# EAGLE board MegaShieldDB (EAGLE 6.4)
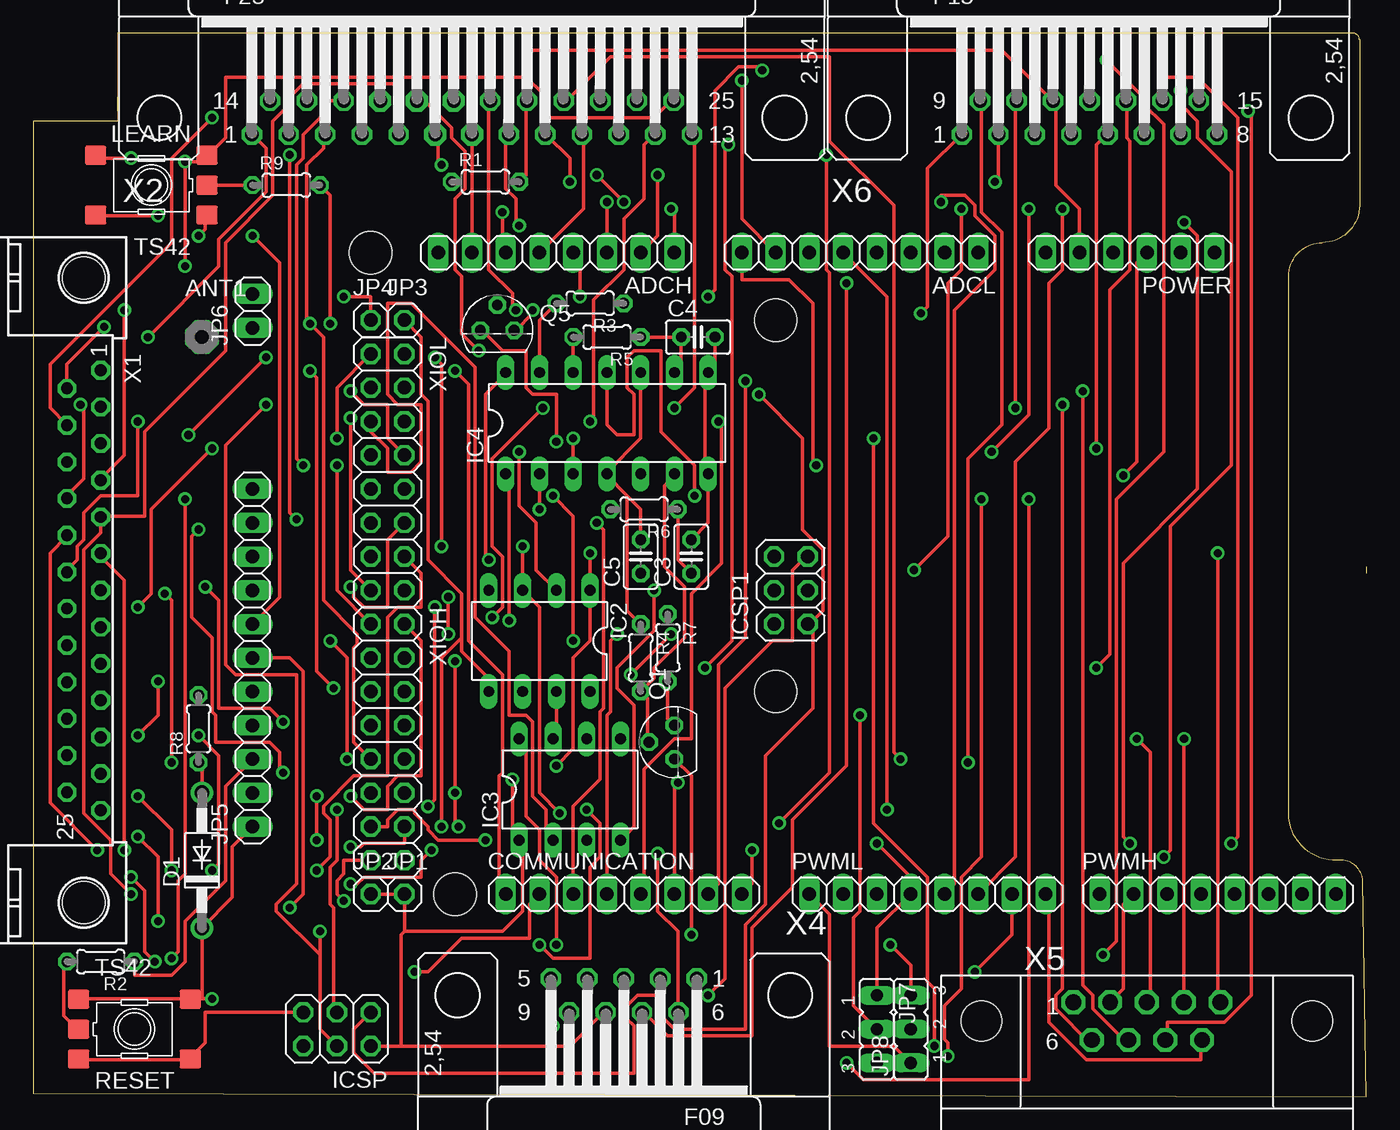
[diagram p0: board, top side]
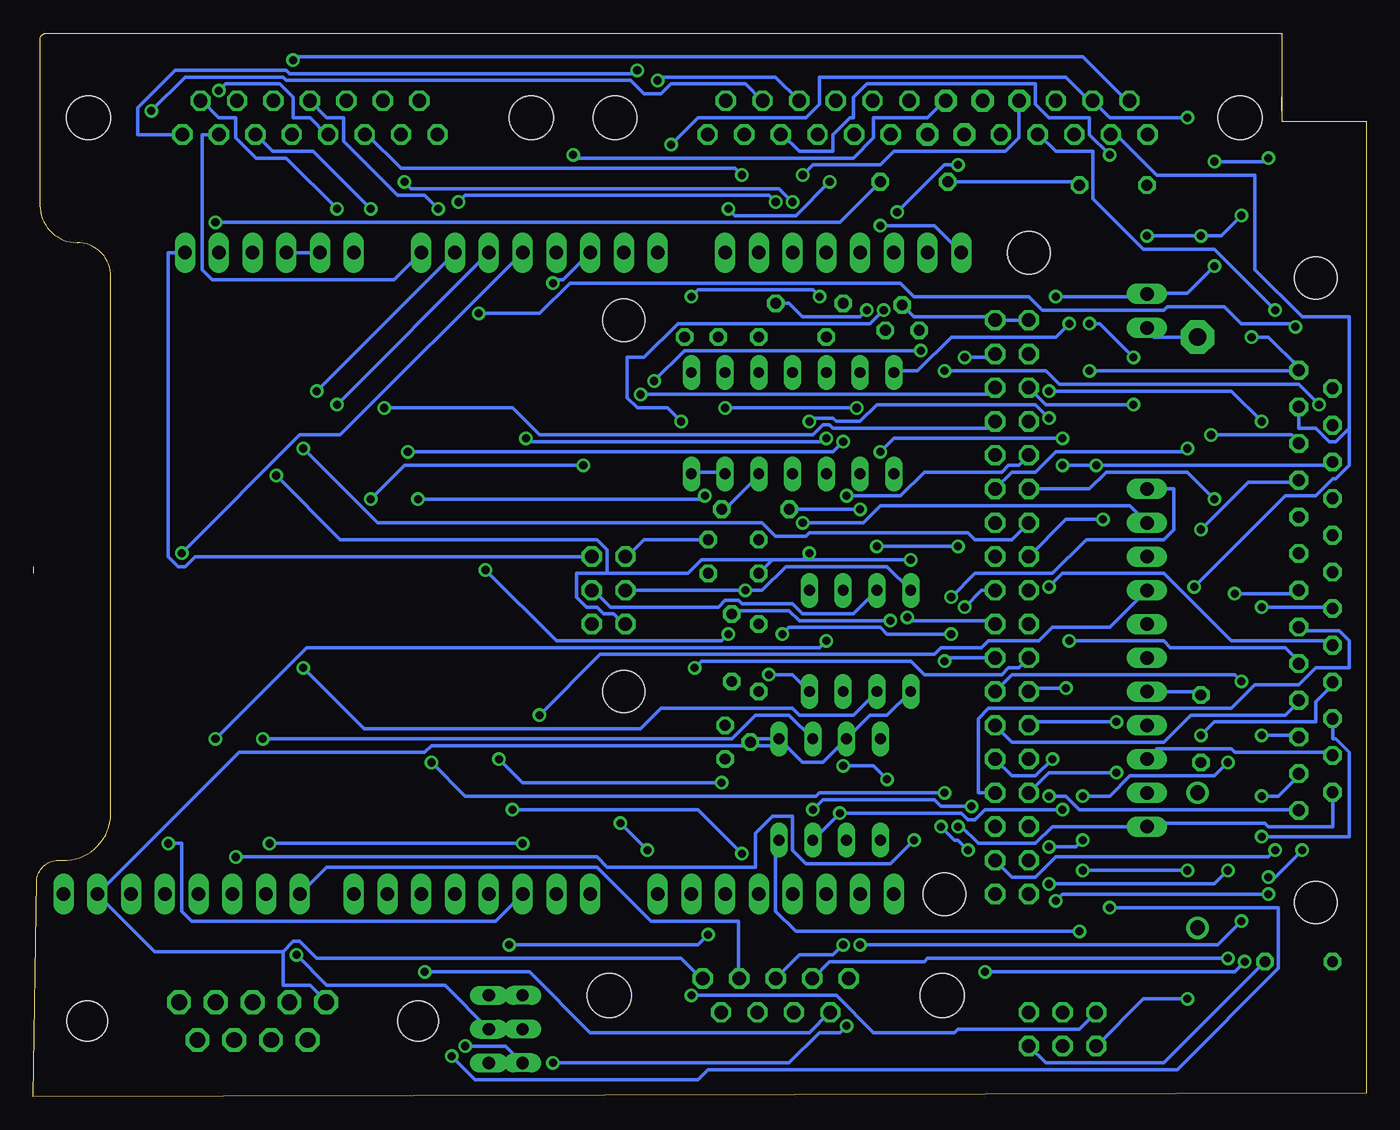
[diagram p1: board, bottom side, seen from below]

Size 100.33 x 80.01 mm. Coordinates in mm from the lower left corner, seen from the top.
Outline: 100.33,39.88 100.33,39.37
Outline: 6.35,74.17 6.35,75.18
Outline: 0,0.25 100.33,0 100.08,16.26 arc90 98.3,17.78 97.79,17.78 arc-90 94.49,21.59 94.49,61.72 arc-90 97.03,64.26 arc90 99.82,67.06 99.82,79.5 arc90 99.31,80.01 6.35,80.01 6.35,73.41 0,73.41 0,0.25
Copper layers (1*16): Top 0.035mm / dielectric 1.5mm / Bottom 0.035mm
Design rules "default": minimum track width 10mil, minimum drill 24mil, track to track 8mil, track to pad 8mil, pad to pad 8mil, via to via 8mil, smd to smd 8mil, copper to edge 40mil, drill to drill 8mil, minimum pad ring 10mil, minimum via ring 8mil, stop-mask expansion 4mil, vias tented up to drill 0mil, thermal gap 10mil
Net classes: 0 default: width 0.152 mm, drill 0.305 mm, clearance 0.152 mm
Holes 3.2 mm at 25.4,63.5 31.75,15.24 55.88,30.48 55.88,58.42 3.81,61.59 3.81,14.61

## Footprints (pad centres in the part's own frame; a part is rotated, then mirrored left to right if it is on the bottom)
1X08 = drill 1.016 long: 1 -8.89,0; 2 -6.35,0; 3 -3.81,0; 4 -1.27,0; 5 1.27,0; 6 3.81,0; 7 6.35,0; 8 8.89,0
PAD-01 = drill 1.321 pad 2.54 octagon: 1 0,0
C025-025X050 = drill 0.813 octagon: 1 -1.27,0; 2 1.27,0
DO41-10 = drill 1.118: A 5.08,0; C -5.08,0
DIL08 = drill 0.813 long: 1 -3.81,-3.81; 2 -1.27,-3.81; 3 1.27,-3.81; 4 3.81,-3.81; 5 3.81,3.81; 6 1.27,3.81; 7 -1.27,3.81; 8 -3.81,3.81
DIL14 = drill 0.813 long: 1 -7.62,-3.81; 2 -5.08,-3.81; 3 -2.54,-3.81; 4 0,-3.81; 5 2.54,-3.81; 6 5.08,-3.81; 7 7.62,-3.81; 8 7.62,3.81; 9 5.08,3.81; 10 2.54,3.81; 11 0,3.81; 12 -2.54,3.81; 13 -5.08,3.81; 14 -7.62,3.81
2X03 = drill 1.016 octagon: 1 -2.54,-1.27; 2 -2.54,1.27; 3 0,-1.27; 4 0,1.27; 5 2.54,-1.27; 6 2.54,1.27
1X01 = drill 1.016 octagon: 1 0,0
1X11 = drill 1.016 long: 1 -12.7,0; 2 -10.16,0; 3 -7.62,0; 4 -5.08,0; 5 -2.54,0; 6 0,0; 7 2.54,0; 8 5.08,0; 9 7.62,0; 10 10.16,0; 11 12.7,0
1X02 = drill 1.016 long: 1 -1.27,0; 2 1.27,0
JP2 = drill 0.914 long: 1 -2.54,0; 2 0,0; 3 2.54,0
TS42 = smd 1.6 x 1.4: 1 -4.2,2.25; 2 4.2,2.25; 3 -4.2,-2.25; 4 4.2,-2.25; 5 -4.2,0
1X06 = drill 1.016 long: 1 -6.35,0; 2 -3.81,0; 3 -1.27,0; 4 1.27,0; 5 3.81,0; 6 6.35,0
TO92 = drill 0.813 octagon: 1 1.27,0; 2 0,1.905; 3 -1.27,0
0204/5 = drill 0.813 octagon: 1 -2.54,0; 2 2.54,0
M25-HD-20 = drill 0.9 pad 1.3 octagon: 1 -16.561,1.27; 2 -13.792,1.27; 3 -11.049,1.27; 4 -8.28,1.27; 5 -5.512,1.27; 6 -2.769,1.27; 7 0,1.27; 8 2.769,1.27; 9 5.512,1.27; 10 8.28,1.27; 11 11.049,1.27; 12 13.792,1.27; 13 16.561,1.27; 14 -15.189,-1.27; 15 -12.421,-1.27; 16 -9.652,-1.27; 17 -6.909,-1.27; 18 -4.14,-1.27; 19 -1.372,-1.27; 20 1.372,-1.27; 21 4.14,-1.27; 22 6.909,-1.27; 23 9.652,-1.27; 24 12.421,-1.27; 25 15.189,-1.27
F25H = drill 1.016 octagon: 1 -16.561,-1.27; 2 -13.792,-1.27; 3 -11.049,-1.27; 4 -8.28,-1.27; 5 -5.512,-1.27; 8 2.769,-1.27; 9 5.512,-1.27; 10 8.28,-1.27; 11 11.049,-1.27; 12 13.792,-1.27; 13 16.561,-1.27; 14 -15.189,1.27; 15 -12.421,1.27; 16 -9.652,1.27; 20 1.372,1.27; 21 4.14,1.27; 22 6.909,1.27; 23 9.652,1.27; 24 12.421,1.27; 25 15.189,1.27 | drill 1.016 pad 1.67 octagon: 6 -2.769,-1.27; 7 0,-1.27; 17 -6.909,1.27; 18 -4.14,1.27; 19 -1.372,1.27 | hole 3.302: -23.52,0; 23.52,0
F09H = drill 1.016 octagon: 1 -5.486,-1.27; 2 -2.743,-1.27; 3 0,-1.27; 4 2.743,-1.27; 5 5.486,-1.27; 6 -4.115,1.27; 7 -1.372,1.27; 8 1.372,1.27; 9 4.115,1.27 | hole 3.302: -12.522,0; 12.522,0
182-009-MALE = drill 1.194 pad 1.524 octagon: 1 -5.537,10.923; 2 -2.769,10.923; 3 0,10.923; 4 2.769,10.923; 5 5.537,10.923; 6 -4.153,8.08; 7 -1.384,8.08; 8 1.384,8.08; 9 4.153,8.08 | hole 3.048: -12.446,9.501; 12.446,9.501
F15H = drill 1.016 octagon: 1 -9.601,-1.27; 2 -6.858,-1.27; 3 -4.115,-1.27; 4 -1.372,-1.27; 5 1.372,-1.27; 6 4.115,-1.27; 7 6.858,-1.27; 8 9.601,-1.27; 9 -8.23,1.27; 10 -5.486,1.27; 11 -2.743,1.27; 12 0,1.27; 13 2.743,1.27; 14 5.486,1.27; 15 8.23,1.27 | hole 3.302: -16.662,0; 16.662,0
2X08 = drill 1.016 octagon: 1 -8.89,-1.27; 2 -8.89,1.27; 3 -6.35,-1.27; 4 -6.35,1.27; 5 -3.81,-1.27; 6 -3.81,1.27; 7 -1.27,-1.27; 8 -1.27,1.27; 9 1.27,-1.27; 10 1.27,1.27; 11 3.81,-1.27; 12 3.81,1.27; 13 6.35,-1.27; 14 6.35,1.27; 15 8.89,-1.27; 16 8.89,1.27

## Placement (x,y rotation side)
ADCH  Analog In 8-15  [1X08]  39.37,63.5 180 top
ADCL  Analog In 0-7  [1X08]  62.23,63.5 180 top
ANT1  170 mm  [PAD-01]  12.7,57.15 0 top
C3  0.1uF  [C025-025X050]  49.53,40.64 90 top
C4  0.1 uF  [C025-025X050]  50.04,57.15 0 top
C5  0.1uF  [C025-025X050]  45.72,40.64 90 top
COMMUNICATION  Digital 14-21  [1X08]  44.45,15.24 0 top
D1  1N4004  [DO41-10]  12.7,17.78 90 top
IC2  MCP4802  [DIL08]  38.1,34.29 180 top
IC3  MCP4802  [DIL08]  40.39,23.11 0 top
IC4  4013N  [DIL14]  43.18,50.67 0 top
ICSP  ICSP  [2X03]  22.86,5.08 180 top
ICSP1  ICSP  [2X03]  57.02,38.1 90 top
JP1  5V  [1X01]  27.94,15.24 0 top
JP2  5V  [1X01]  25.4,15.24 0 top
JP3  GND  [1X01]  27.94,58.42 0 top
JP4  GND  [1X01]  25.4,58.42 0 top
JP5  Receiver  [1X11]  16.51,33.02 90 top
JP6  Receiver  [1X02]  16.51,59.12 90 top
JP7  [JP2]  63.5,5.08 270 top
JP8  [JP2]  66.04,5.08 90 top
LEARN  TS42  [TS42]  8.89,68.58 180 top
POWER  POWER  [1X06]  82.55,63.5 180 top
PWMH  Digital 8-13  [1X08]  89.15,15.24 0 top
PWML  Digital 0-7  [1X08]  67.31,15.24 0 top
Q1  BF199  [TO92]  48.26,26.67 90 top
Q5  BF199  [TO92]  34.92,57.66 0 top
R1  1M  [0204/5]  34.04,68.83 0 top
R2  10M  [0204/5]  5.08,10.16 180 top
R3  4.7k  [0204/5]  41.91,59.69 180 top
R4  1M  [0204/5]  45.72,33.02 270 top
R5  10M  [0204/5]  43.18,57.15 180 top
R6  10M  [0204/5]  45.97,44.2 180 top
R7  4.7k  [0204/5]  47.75,33.78 270 top
R8  10M  [0204/5]  12.45,27.69 90 top
R9  10M  [0204/5]  19.05,68.58 0 top
RESET  TS42  [TS42]  7.62,5.08 0 top
X1  M25-HD-20  [M25-HD-20]  3.81,38.1 270 top
X2  Cruise Computers  [F25H]  33.02,73.66 0 top
X4  Steer  [F09H]  44.45,7.62 180 top
X5  Brake  [182-009-MALE]  83.82,-3.81 0 top
X6  [F15H]  79.5,73.66 0 top
XIOH  Digital 22-37  [2X08]  26.67,26.67 270 top
XIOL  Digital 38-53  [2X08]  26.67,46.99 270 top

## Library data of the parts
ADCH ADCL COMMUNICATION ICSP ICSP1 JP1-JP6 POWER PWMH PWML XIOH XIOL = pinhead
ANT1 = discrete
C3-C5 R1-R9 = rcl
D1 = diode
IC2-IC4 = ic-package
JP7 JP8 = jumper
LEARN RESET = st-mod v1.4
Q1 Q5 = transistor-npn
X1 X2 X4-X6 = con-subd; OC_FARNELL: unknown; OC_NEWARK: unknown

## Nets
5VBRK: X2.24 X5.8
+5V: C5.1 IC2.1 IC3.1 IC4.14 ICSP1.2 ICSP.2 JP1.1 JP2.1 JP5.3 POWER.3 R1.1 R2.1 R9.2 X1.24 X4.8
A0: ADCL.1 X6.7
A1: ADCL.2 X5.7
A4: ADCL.5 X4.6
A5: ADCL.6 X4.7
A6: ADCL.7 X2.23
A7: ADCL.8 X4.5
A9: ADCH.2 X6.3
A10: ADCH.3 X6.2
A11: ADCH.4 X6.8
A12: ADCH.5 X2.10
A13: ADCH.6 X2.6
A14: ADCH.7 X2.7
A15: ADCH.8 X2.8
CLKA: IC4.3 JP7.3
CLKB: IC4.11 JP5.6
D0RX0: JP8.1 PWML.1
D2INT0: PWML.3 X6.14
D3INT1: JP7.1 PWML.4 R1.2 X2.21
D4: PWML.5 X2.17
D5: PWML.6 X6.15
D6: PWML.7 X4.9
D7: PWML.8 X5.9
D8: PWMH.1 X4.2
D9: PWMH.2 X5.2
D14TXD3: COMMUNICATION.8 X2.19
D15RXD3: COMMUNICATION.7 X2.18
D16TXD2: COMMUNICATION.6 X2.22
D17RXD2: COMMUNICATION.5 X2.20
D18INT2: COMMUNICATION.4 JP5.11
D19INT3: COMMUNICATION.3 JP5.10
D20INT4: COMMUNICATION.2 X1.18
D21INT5: COMMUNICATION.1 X1.17
D22: X1.6 XIOH.16
D23: X1.5 X2.5 XIOH.15
D24: X1.7 XIOH.14
D25: X6.4 XIOH.13
D26: X1.8 XIOH.12
D27: X1.4 X2.4 XIOH.11
D28: X1.9 XIOH.10
D29: X1.3 X2.3 XIOH.9
D30: X1.10 XIOH.8
D31: X1.2 X2.2 XIOH.7
D32: X1.11 XIOH.6
D33: X1.1 X2.1 XIOH.5
D34: X1.12 X6.9 XIOH.4
D35: X1.15 X2.15 XIOH.3
D36: X1.13 X2.13 XIOH.2
D37: X1.16 X2.16 XIOH.1
D38: X1.23 XIOL.16
D39: X2.12 XIOL.15
D40: X1.22 XIOL.14
D41: X2.11 XIOL.13
D42: X1.21 XIOL.12
D43: X6.5 XIOL.11
D44: X1.20 XIOL.10
D45: X4.4 XIOL.9
D46: X1.19 XIOL.8
D47: X5.4 XIOL.7
D48: X6.10 XIOL.6
D49: IC3.2 XIOL.5
D51: IC2.4 IC3.4 ICSP1.4 ICSP.4 XIOL.3
D52: IC2.3 IC3.3 ICSP1.3 ICSP.3 XIOL.2
D53: IC2.2 XIOL.1
DA: C3.1 IC4.5 R6.1
DACA: IC2.8 X6.12
DACB: IC2.6 X6.13
DACC: IC3.8 X4.3
DACD: IC3.6 X5.3
DB: C4.1 IC4.9 R5.1
FUEL: X1.14 X6.1
GND: C3.2 C4.2 D1.C IC2.5 IC2.7 IC3.5 IC3.7 IC4.6 IC4.7 IC4.8 ICSP1.6 ICSP.6 JP3.1 JP4.1 JP5.1 JP6.2 LEARN.3 LEARN.4 POWER.4 POWER.5 PWMH.7 Q1.2 Q5.2 R4.2 RESET.1 RESET.2 X1.25 X2.25 X4.1 X5.1 X6.11
N$1: ADCL.3 X5.6
N$2: IC4.1 R7.1
N$4: IC4.13 R3.2
N$5: ADCH.1 X2.9
N$6: R2.2 RESET.5
N$7: IC4.2 R6.2
N$8: ADCL.4 X5.5
N$9: ICSP1.1 ICSP.1 XIOL.4
N$10: LEARN.5 R9.1
N$12: Q1.1 R7.2
N$26: ANT1.1 JP6.1
N$28: JP5.7 LEARN.1 LEARN.2
N$33: Q5.1 R3.1
N$40: D1.A R8.1
RA: C5.2 IC4.4 IC4.10 R4.1
RCVR5: JP5.5 R8.2
RESET: ICSP1.5 ICSP.5 POWER.1 RESET.3 RESET.4
WL2: JP5.8 JP7.2
WLES: Q5.3 X6.6
WLXCOLL: JP8.3 Q1.3
X2-14: JP8.2 X2.14
~QB: IC4.12 R5.2

## Tracks (layer width: path | path; a pad name or v marks a point on that pad's centre or on a via)
5VBRK  (via drill 0.61)
  Top 0.254: v91.44,74.17 91.69,73.91 91.69,7.62 89.66,5.59 85.34,5.59 85.34,4.32 X5.8
  Bottom 0.254: v91.44,74.17 88.9,76.71 81.53,76.71 81.28,76.45 55.37,76.45 54.36,75.44 53.09,75.44 52.32,76.2 46.74,76.2 45.47,74.93 X2.24
+5V  (via drill 0.61)
  Top 0.254: 27.94,12.45 35.31,12.45 36.83,13.97 36.83,19.05 IC3.1 36.07,19.81 v36.07,23.88 | 27.94,12.45 JP1.1 JP2.1 | ICSP.2 27.69,3.81 | 27.69,3.81 40.39,3.81 42.93,6.35 X4.8 | JP5.3 14.48,23.37 14.48,16.26 11.43,13.21 11.43,10.16 10.41,9.14 7.62,9.14 R2.1 | 27.94,12.45 27.69,12.19 27.69,3.81 | v41.91,40.89 IC2.1 41.91,34.29 40.64,33.02 40.64,26.16 v39.37,24.89 | v34.29,40.39 34.04,40.64 34.04,52.83 35.56,54.36 IC4.14 | POWER.3 83.06,62.74 83.06,47.75 v82.04,46.74 | R9.2 22.35,67.82 v22.35,58.17
  Bottom 0.254: JP5.3 15.75,26.16 10.16,26.16 9.91,25.91 2.54,25.91 X1.24 | R2.1 15.24,2.54 24.13,2.54 ICSP.2 | R9.2 21.84,68.83 R1.1 | 42.42,40.39 v41.91,40.89 | 44.7,40.39 42.42,40.39 | C5.1 44.7,40.39 | 42.42,40.39 v34.29,40.39 | 57.15,39.37 51.05,39.37 50.04,40.39 44.7,40.39 | 57.15,39.37 59.44,39.37 59.44,37.59 58.67,36.83 57.91,36.83 57.4,36.32 56.64,36.32 55.88,35.56 ICSP1.2 | v82.04,46.74 77.22,41.91 57.91,41.91 57.15,41.15 57.15,39.37 | v22.35,58.17 23.37,57.15 31.24,57.15 33.78,54.61 35.56,54.61 IC4.14 | v36.07,23.88 37.08,24.89 v39.37,24.89
A0
  Bottom 0.254: ADCL.1 73.15,61.47 86.87,61.47 87.63,62.23 87.63,72.39 X6.7
A1  (via drill 0.61)
  Top 0.254: v78.99,53.09 78.99,8.38 79.76,7.62 79.76,6.6 82.3,4.06 X5.7
  Bottom 0.254: v78.99,53.09 ADCL.2
A4  (via drill 0.61)
  Top 0.254: v46.99,18.29 46.99,13.97 48.51,12.45 48.51,6.35 X4.6 | v64.26,21.59 64.26,60.2 ADCL.5
  Bottom 0.254: v46.99,18.29 50.29,21.59 v64.26,21.59
A5  (via drill 0.61)
  Top 0.254: v61.21,61.21 61.21,24.89 57.15,20.83 57.15,15.75 54.1,12.7 54.1,4.57 47.75,4.57 45.97,6.35 X4.7
  Bottom 0.254: v61.21,61.21 60.96,61.47 60.45,61.47 ADCL.6
A6  (via drill 0.61)
  Top 0.254: ADCL.7 53.34,66.04 v53.34,76.45
  Bottom 0.254: v53.34,76.45 53.09,76.71 44.45,76.71 X2.23
A7  (via drill 0.61)
  Top 0.254: v39.12,5.33 39.12,8.89 X4.5 | v61.21,2.54 62.48,1.27 74.93,1.27 v74.93,44.96 | v58.93,47.5 58.67,47.75 58.67,59.69 56.9,61.47 53.34,61.47 ADCL.8
  Bottom 0.254: v39.12,5.33 39.62,4.83 41.15,4.83 43.43,2.54 v61.21,2.54 | v74.93,44.96 72.39,47.5 v58.93,47.5
A9  (via drill 0.61)
  Top 0.254: ADCH.2 46.99,64.77 v46.99,69.34
  Bottom 0.254: v46.99,69.34 47.5,69.85 72.64,69.85 75.18,72.39 X6.3
A10  (via drill 0.61)
  Top 0.254: v43.18,67.31 ADCH.3 | v72.39,68.83 72.64,69.09 X6.2
  Bottom 0.254: v43.18,67.31 44.2,68.33 71.88,68.33 v72.39,68.83
A11  (via drill 0.61)
  Top 0.254: ADCH.4 41.15,62.99 v41.15,60.2 | v50.8,60.2 51.31,60.71 51.31,75.69 53.09,77.47 54.86,77.47 v54.86,77.22
  Bottom 0.254: v41.15,60.2 41.66,60.71 50.29,60.71 v50.8,60.2 | v54.86,77.22 55.12,76.96 81.03,76.96 81.28,77.22 89.66,77.22 92.46,74.42 92.46,72.39 X6.8
A12
  Top 0.254: ADCH.5 41.4,66.8 41.4,72.39 X2.10
A13  (via drill 0.61)
  Top 0.254: ADCH.6 35.31,63.75 v35.31,66.55 | v30.73,70.1 30.48,70.36 30.48,72.39 X2.6
  Bottom 0.254: v35.31,66.55 31.75,70.1 v30.73,70.1
A14
  Top 0.254: X2.7 ADCH.7
A15  (via drill 0.61)
  Top 0.254: v36.58,65.53 36.32,65.79 36.32,67.56 35.56,68.33 35.56,72.39 X2.8
  Bottom 0.254: ADCH.8 32.51,65.53 v36.58,65.53
CLKA  (via drill 0.61)
  Top 0.254: v40.64,49.53 IC4.3 | v63.25,49.53 63.25,20.57 67.31,16.51 67.31,8.64 67.82,8.13 v67.82,3.81
  Bottom 0.254: v40.64,49.53 40.89,49.28 62.99,49.28 v63.25,49.53 | v67.82,3.81 64.77,3.81 JP7.3
CLKB  (via drill 0.61)
  Top 0.254: IC4.11 43.18,50.55 43.94,49.78 45.21,49.78 45.21,52.83 44.7,53.34 44.7,55.63 45.21,56.13 47.24,56.13 47.24,50.04 49.78,47.5 v49.78,45.21 | v71.37,44.96 71.37,18.03 69.85,16.51 69.85,8.13 68.58,6.86 68.58,4.32 68.83,4.06 v68.83,3.05 | v19.3,14.22 20.32,15.24 20.32,32 19.3,33.02 JP5.6
  Bottom 0.254: v49.78,45.21 50.04,44.96 v71.37,44.96 | v68.83,3.05 67.06,1.27 50.29,1.27 49.53,2.03 14.22,2.03 6.6,9.65 6.6,14.22 v19.3,14.22
D0RX0
  Top 0.254: JP8.1 64.77,3.81 59.94,3.81 59.94,13.72 PWML.1
D2INT0  (via drill 0.61)
  Top 0.254: v90.17,19.05 90.68,19.56 90.68,73.66 87.63,76.71 85.09,76.71 85.09,74.93 X6.14
  Bottom 0.254: PWML.3 65.53,13.21 88.39,13.21 89.15,13.97 89.15,19.05 v90.17,19.05
D3INT1  (via drill 0.61)
  Top 0.254: R1.2 37.08,69.34 37.08,74.93 X2.21 | JP7.1 63.5,12.7 PWML.4 66.04,16.51 v63.5,19.05 | v86.61,65.79 87.63,64.77 87.63,45.72 82.04,40.13 82.04,19.56 v82.55,19.05
  Bottom 0.254: R1.2 39.62,65.79 v86.61,65.79 | v63.5,19.05 v82.55,19.05
D4  (via drill 0.61)
  Top 0.254: PWML.5 69.34,16 69.34,59.18 72.39,62.23 72.39,64.77 70.87,66.29 70.87,67.06 70.1,67.82 68.33,67.82 v68.33,67.31 | v42.42,69.34 v44.45,67.31
  Bottom 0.254: v68.33,67.31 67.82,67.82 44.96,67.82 v44.45,67.31 | v42.42,69.34 41.66,70.1 36.58,70.1 35.56,71.12 27.18,71.12 26.16,72.14 26.16,74.93 X2.17
D5  (via drill 0.61)
  Top 0.254: PWML.6 73.91,18.03 73.91,47.75 76.45,50.29 76.45,61.21 77.47,62.23 v77.47,66.8
  Bottom 0.254: v77.47,66.8 81.28,70.61 83.57,70.61 85.09,72.14 85.09,73.66 86.36,73.66 87.63,74.93 X6.15
D6  (via drill 0.61)
  Top 0.254: v70.87,9.4 73.66,12.19 PWML.7
  Bottom 0.254: v70.87,9.4 62.99,9.4 58.42,4.83 41.91,4.83 40.39,6.35 X4.9
D7
  Top 0.254: PWML.8 76.45,14.99 76.45,5.59 79.25,2.79 87.88,2.79 87.88,4.06 X5.9
D8
  Bottom 0.254: PWMH.1 78.23,17.27 57.91,17.27 53.85,13.21 47.24,13.21 47.24,8.89 X4.2
D9
  Top 0.254: PWMH.2 82.04,14.48 82.04,8.13 81.28,7.37 X5.2
D14TXD3  (via drill 0.61)
  Top 0.254: COMMUNICATION.8 54.1,16 v54.1,18.54 | v56.13,20.57 59.94,24.38 59.94,61.98 59.69,62.23 v59.69,70.87
  Bottom 0.254: v56.13,20.57 v54.1,18.54 | v59.69,70.87 59.44,70.61 38.61,70.61 37.08,72.14 37.08,73.66 33.02,73.66 31.75,74.93 X2.19
D15RXD3  (via drill 0.61)
  Top 0.254: COMMUNICATION.7 51.56,16 51.56,32.51 53.59,34.54 v53.59,53.85 | v33.53,56.13 32.26,57.4 32.26,61.72 31.75,62.23 31.75,67.56 32.51,68.33 32.51,71.12 31.5,72.14 31.5,72.9 29.46,74.93 X2.18
  Bottom 0.254: v53.59,53.85 51.31,56.13 v33.53,56.13
D16TXD2  (via drill 0.61)
  Top 0.254: v65.28,25.4 64.77,25.91 64.77,67.06 59.94,71.88 59.94,78.23 43.43,78.23 40.13,74.93 X2.22 | v48.51,23.62 48.26,23.37 COMMUNICATION.6
  Bottom 0.254: v65.28,25.4 63.5,23.62 v48.51,23.62
D17RXD2  (via drill 0.61)
  Top 0.254: COMMUNICATION.5 45.97,15.49 45.97,24.64 48.26,26.92 49.53,26.92 49.53,37.85 51.82,40.13 51.82,50.55 v51.56,50.8 | v36.32,59.18 36.07,59.44 36.07,60.45 34.29,62.23 34.29,74.93 X2.20
  Bottom 0.254: v51.56,50.8 52.58,51.82 54.86,51.82 55.63,52.58 55.63,55.63 54.36,55.63 51.82,58.17 37.34,58.17 v36.32,59.18
D18INT2  (via drill 0.61)
  Top 0.254: COMMUNICATION.4 43.18,28.7 43.43,28.96 43.43,34.29 v43.94,34.8 | v31.24,37.59 v31.24,34.8
  Bottom 0.254: v43.94,34.8 43.43,35.31 36.58,35.31 36.07,34.8 v31.24,34.8 | v31.24,37.59 29.46,39.37 23.62,39.37 21.08,41.91 15.24,41.91 14.48,42.67 14.48,45.72 JP5.11
D19INT3  (via drill 0.61)
  Top 0.254: v42.42,43.18 42.93,42.67 42.93,29.21 42.67,28.96 42.67,23.88 40.64,21.84 COMMUNICATION.3
  Bottom 0.254: JP5.10 17.78,44.45 36.58,44.45 37.85,43.18 v42.42,43.18
D20INT4  (via drill 0.61)
  Top 0.254: v4.83,18.54 1.27,22.1 1.27,40.89 2.54,42.16 X1.18 | v7.37,16.51 8.38,15.49 8.38,10.92 v9.14,10.16 | v28.7,9.4 29.72,9.4 32.26,11.94 37.34,11.94 37.34,14.48 COMMUNICATION.2
  Bottom 0.254: v4.83,18.54 6.86,16.51 v7.37,16.51 | v9.14,10.16 9.91,9.4 v28.7,9.4
D21INT5  (via drill 0.61)
  Top 0.254: v3.56,52.07 3.81,51.82 3.81,46.48 2.54,45.21 X1.17 | v31.75,54.61 32.77,53.59 32.77,34.29 35.31,31.75 35.31,24.38 35.05,24.13 35.05,15.75 COMMUNICATION.1
  Bottom 0.254: v3.56,52.07 5.08,53.59 23.11,53.59 24.13,54.61 v31.75,54.61
D22  (via drill 0.61)
  Top 0.254: v6.86,18.54 6.86,38.86 5.08,40.64 X1.6
  Bottom 0.254: v6.86,18.54 7.37,18.03 23.37,18.03 24.89,16.51 26.67,16.51 XIOH.16
D23  (via drill 0.61)
  Top 0.254: X2.5 27.43,72.39 27.43,76.2 20.32,76.2 19.3,75.18 19.3,74.68 18.03,73.41 18.03,67.82 14.48,64.26 14.48,56.13 8.38,50.04 8.38,43.69 5.08,43.69 X1.5 5.08,42.42 3.81,41.15 3.81,21.34 5.84,19.3 5.84,16.76 v7.37,15.24 | XIOH.15 23.37,17.78 23.37,16.76 22.86,16.26 22.86,15.24 v23.37,14.73
  Bottom 0.254: v23.37,14.73 22.86,15.24 v7.37,15.24
D24  (via drill 0.61)
  Top 0.254: v9.91,37.85 10.41,37.34 v10.41,25.15 | v21.34,19.3 v21.34,22.61 | v23.88,18.8 24.64,18.8 24.89,19.05 27.94,19.05 XIOH.14
  Bottom 0.254: X1.7 5.33,37.85 v9.91,37.85 | v10.41,25.15 11.43,24.13 17.78,24.13 19.3,22.61 v21.34,22.61 | v21.34,19.3 21.84,18.8 v23.88,18.8
D25  (via drill 0.61)
  Top 0.254: XIOH.13 26.67,20.32 26.67,20.83 27.43,21.59 28.7,21.59 28.7,21.34 29.72,20.32 29.72,20.07 30.48,19.3 v34.04,19.3 | v85.09,18.03 85.6,18.54 85.6,42.93 90.17,47.5 90.17,69.6 87.63,72.14 87.63,73.41 86.36,74.68 v86.36,75.69
  Bottom 0.254: v34.04,19.3 35.81,17.53 42.16,17.53 43.18,18.54 43.18,21.08 44.7,21.08 45.97,19.81 45.97,17.27 57.15,17.27 57.91,18.03 v85.09,18.03 | v86.36,75.69 85.85,76.2 81.79,76.2 80.77,75.18 80.77,73.66 79.5,73.66 78.23,72.39 X6.4
D26
  Bottom 0.254: XIOH.12 29.21,22.86 29.21,28.45 28.45,29.21 10.16,29.21 8.38,30.99 5.08,30.99 3.81,32.26 1.27,32.26 1.27,34.29 2.03,35.05 4.83,35.05 5.08,35.31 X1.8
D27  (via drill 0.61)
  Top 0.254: v6.86,59.18 6.86,48.26 5.08,46.48 X1.4 | v18.8,24.38 18.54,24.64 18.54,25.91 17.78,26.67 13.72,26.67 13.72,28.7 13.46,28.96 13.46,34.54 11.94,36.07 11.94,42.16 v12.45,42.67
  Bottom 0.254: v6.86,59.18 11.43,63.75 16.76,63.75 20.57,67.56 20.57,71.12 23.37,71.12 24.64,72.39 X2.4 | XIOH.11 23.88,24.38 v18.8,24.38 | v12.45,42.67 8.89,46.23 5.08,46.23 X1.4
D28  (via drill 0.61)
  Top 0.254: v22.35,34.29 23.62,33.02 v23.62,25.4
  Bottom 0.254: v22.35,34.29 15.24,34.29 14.73,33.78 6.1,33.78 5.08,32.77 X1.9 | v23.62,25.4 24.89,24.13 26.67,24.13 XIOH.10
D29  (via drill 0.61)
  Top 0.254: v17.53,55.63 v11.68,49.78 | X2.3 21.84,72.39 21.84,71.37 20.57,70.1 20.57,58.42 v20.83,58.17 21.84,57.15 21.84,37.34 24.38,34.8 24.38,34.04 24.13,33.78 24.13,26.67 XIOH.9
  Bottom 0.254: v11.68,49.78 5.59,49.78 5.08,49.28 X1.3 | v17.53,55.63 20.07,58.17 v20.83,58.17
D30
  Bottom 0.254: XIOH.8 26.67,26.67 15.24,26.67 13.21,28.7 6.1,28.7 5.08,29.72 X1.10
D31  (via drill 0.61)
  Top 0.254: v18.8,28.19 17.78,29.21 13.97,29.21 13.97,37.34 v12.95,38.35
  Bottom 0.254: X1.2 5.08,50.29 3.81,50.29 2.79,49.28 2.29,49.28 1.27,50.29 | 1.27,50.29 1.27,58.67 4.83,58.67 8.38,62.23 8.38,69.34 15.75,69.34 18.8,72.39 X2.2 | XIOH.7 25.15,28.19 v18.8,28.19 | v12.95,38.35 6.1,45.21 3.81,45.21 2.54,46.48 2.29,46.48 1.27,47.5 1.27,50.29
D32  (via drill 0.61)
  Top 0.254: v7.87,27.18 9.4,28.7 v9.4,31.24
  Bottom 0.254: v7.87,27.18 5.08,27.18 X1.11 | v9.4,31.24 9.91,31.75 26.67,31.75 XIOH.6
D33  (via drill 0.61)
  Top 0.254: v8.64,57.15 13.97,62.48 13.97,64.52 17.53,68.07 17.53,71.37 16.51,72.39 X2.1 | v22.61,30.73 21.34,32 21.34,54.1 v20.83,54.61
  Bottom 0.254: v8.64,57.15 7.37,57.15 5.08,54.86 X1.1 5.08,54.61 v20.83,54.61 | XIOH.5 25.15,30.73 v22.61,30.73
D34  (via drill 0.61)
  Top 0.254: v7.87,22.61 10.41,20.07 v10.41,17.02 | v23.88,16 24.38,16 24.89,16.51 29.21,16.51 29.21,17.78 v29.97,18.54 | v32,20.32 31.75,20.57 v31.75,22.86 v31.75,32.77 | v70.36,25.15 70.36,48.01 72.9,50.55 72.9,65.02 71.37,66.55 71.37,74.93 X6.9
  Bottom 0.254: v7.87,22.61 6.6,22.61 5.08,24.13 X1.12 | v10.41,17.02 11.43,16 v23.88,16 | v29.97,18.54 30.73,19.3 30.99,19.3 v32,20.32 | v31.75,32.77 31.5,33.02 XIOH.4 | v70.36,25.15 67.82,22.61 41.4,22.61 41.15,22.86 v31.75,22.86
D35  (via drill 0.61)
  Top 0.254: v13.46,73.66 10.41,70.61 10.41,64.26 1.27,55.12 1.27,51.82 2.54,50.55 X1.15 | v50.55,32.26 52.58,34.29 52.58,61.72 52.07,62.23 52.07,71.37 v52.32,71.63
  Bottom 0.254: v13.46,73.66 19.3,73.66 20.57,74.93 X2.15 20.83,74.93 22.61,76.71 41.15,76.71 41.15,74.68 42.16,73.66 50.29,73.66 v52.32,71.63 | XIOH.3 26.16,32.26 26.92,32.26 27.43,31.75 33.27,31.75 34.29,32.77 50.04,32.77 v50.55,32.26
D36  (via drill 0.61)
  Top 0.254: v23.88,22.61 24.89,21.59 26.67,21.59 26.67,23.37 27.43,24.13 29.21,24.13 29.21,34.29 XIOH.2 | v48.26,51.82 49.78,53.34 49.78,72.39 X2.13 | v38.35,51.82 34.54,48.01 34.54,41.4 35.31,40.64 35.31,36.83 v34.54,36.07
  Bottom 0.254: v23.88,22.61 22.61,22.61 21.59,21.59 5.08,21.59 X1.13 | v38.35,51.82 v48.26,51.82 | v34.54,36.07 34.29,35.81 28.19,35.81 XIOH.2
D37  (via drill 0.61)
  Top 0.254: v22.86,47.5 22.86,38.1 XIOH.1 | X2.16 21.84,74.93 21.84,73.91 20.32,72.39 20.32,70.61 19.81,70.1 19.81,48.01 v20.32,47.5
  Bottom 0.254: X1.16 2.79,47.5 v20.32,47.5 v22.86,47.5
D38  (via drill 0.61)
  Top 0.254: v7.87,19.56 9.4,18.03 v9.4,13.21 | v38.1,11.43 39.12,10.41 41.91,10.41 41.91,17.27 42.67,18.03 42.67,20.57 v41.66,21.59 | v29.72,21.84 30.23,22.35 v30.23,36.83
  Bottom 0.254: X1.23 2.54,26.92 2.29,26.92 1.27,25.91 1.27,19.56 v7.87,19.56 | v9.4,13.21 11.18,11.43 v38.1,11.43 | v41.66,21.59 40.89,22.35 32.51,22.35 32,21.84 v29.72,21.84 | v30.23,36.83 28.96,38.1 XIOL.16
D39  (via drill 0.61)
  Top 0.254: XIOL.15 23.88,39.62 v23.88,51.05 | v41.91,50.8 42.16,51.05 42.16,59.94 44.45,62.23 44.45,66.04 45.97,67.56 45.97,71.63 46.74,72.39 X2.12
  Bottom 0.254: v23.88,51.05 24.89,52.07 36.83,52.07 38.1,50.8 39.88,50.8 40.13,51.05 41.66,51.05 v41.91,50.8
D40  (via drill 0.61)
  Top 0.254: v12.45,27.18 13.97,25.65 13.97,17.53 v13.46,17.02 | v21.34,17.02 22.35,18.03 22.35,20.83 21.84,21.34 21.84,21.84 24.13,24.13 26.67,24.13 26.67,36.07 27.43,36.83 29.21,36.83 29.21,39.37 XIOL.14
  Bottom 0.254: v12.45,27.18 11.43,28.19 3.81,28.19 3.81,29.72 2.54,30.99 X1.22 | v21.34,17.02 v13.46,17.02
D41  (via drill 0.61)
  Top 0.254: v19.81,43.43 19.3,43.94 v19.3,70.87
  Bottom 0.254: XIOL.13 22.61,43.43 v19.81,43.43 | v19.3,70.87 20.83,72.39 20.83,73.66 23.88,73.66 24.89,74.68 24.89,76.2 37.59,76.2 38.61,75.18 38.61,73.66 38.86,73.66 40.13,72.39 40.13,71.12 42.67,71.12 43.94,72.39 X2.11
D42  (via drill 0.61)
  Top 0.254: v23.88,38.35 24.13,38.1 24.13,37.59 24.89,36.83 26.67,36.83 26.67,41.91 XIOL.12
  Bottom 0.254: v23.88,38.35 22.86,39.37 15.24,39.37 10.16,34.29 2.79,34.29 2.54,34.04 X1.21
D43  (via drill 0.61)
  Top 0.254: v80.01,48.77 80.01,71.63 80.77,72.39 X6.5
  Bottom 0.254: XIOL.11 26.67,41.91 29.46,41.91 29.97,42.42 41.91,42.42 42.16,42.16 44.45,42.16 45.47,43.18 74.42,43.18 v80.01,48.77
D44  (via drill 0.61)
  Top 0.254: v7.87,36.83 8.89,37.85 8.89,44.2 v13.46,48.77
  Bottom 0.254: v7.87,36.83 2.54,36.83 X1.20 | v13.46,48.77 13.72,48.51 23.37,48.51 24.89,46.99 26.67,46.99 XIOL.10
D45  (via drill 0.61)
  Top 0.254: v10.41,10.41 10.92,10.92 10.92,16.26 11.43,16.76 v11.43,44.96
  Bottom 0.254: v10.41,10.41 33.02,10.41 33.27,10.16 40.39,10.16 41.66,8.89 X4.4 | v11.43,44.96 13.46,46.99 19.56,46.99 20.83,45.72 XIOL.9
D46  (via drill 0.61)
  Top 0.254: v7.87,50.8 7.87,45.21 5.08,45.21 3.81,43.94 3.81,41.91 3.3,41.4 3.3,40.39 2.54,39.62 X1.19 | v23.88,53.09 24.89,52.07 26.67,52.07 26.67,49.53 XIOL.8
  Bottom 0.254: v7.87,50.8 10.16,53.09 v23.88,53.09
D47  (via drill 0.61)
  Top 0.254: v39.12,45.21 40.64,43.69 v40.64,34.29 | v86.61,26.92 86.61,7.37 X5.4
  Bottom 0.254: XIOL.7 26.16,47.5 26.92,47.5 27.43,46.99 33.27,46.99 35.05,45.21 v39.12,45.21 | v40.64,34.29 41.15,33.78 79.76,33.78 v86.61,26.92
D48  (via drill 0.61)
  Top 0.254: v73.91,51.82 73.91,74.93 X6.10
  Bottom 0.254: XIOL.6 28.45,50.29 40.13,50.29 40.39,50.55 40.89,50.55 41.66,49.78 62.23,49.78 64.26,51.82 v73.91,51.82
D49
  Top 0.254: IC3.2 38.61,19.81 38.61,21.59 37.59,22.61 37.59,28.19 37.08,28.7 35.81,28.7 35.81,33.53 33.27,36.07 33.27,54.86 28.45,59.69 26.67,59.69 26.67,52.83 27.43,52.07 29.21,52.07 29.21,47.75 28.45,46.99 26.67,46.99 26.67,48.77 25.4,50.04 XIOL.5
D51  (via drill 0.61)
  Top 0.254: IC3.4 45.21,20.32 45.21,29.46 43.94,30.73 43.94,32.26 46.74,35.05 v46.74,38.1 | ICSP.4 21.59,5.08 21.59,10.67 | v21.59,12.45 21.59,10.67 | v17.53,52.07 14.48,49.02 14.48,32.51 15.24,31.75 19.81,31.75 19.81,16 18.29,14.48 18.29,13.97 21.59,10.67
  Bottom 0.254: ICSP1.4 v46.74,38.1 45.47,38.1 43.69,39.88 36.07,39.88 IC2.4 | v21.59,12.45 42.93,12.45 44.45,13.97 44.45,19.3 IC3.4 | XIOL.3 24.13,52.07 v17.53,52.07
D52  (via drill 0.61)
  Top 0.254: v39.62,21.34 38.1,22.86 38.1,36.83 IC2.3 v36.83,41.4 | ICSP.3 22.61,6.6 22.61,14.22 22.35,14.48 22.35,17.27 22.86,17.78 v22.86,21.59 | v30.23,55.63 30.73,55.12 v30.73,41.4
  Bottom 0.254: IC3.3 v39.62,21.34 30.48,21.34 29.97,20.83 29.46,20.83 28.7,21.59 v22.86,21.59 | XIOL.2 28.19,55.63 v30.23,55.63 | v36.83,41.4 v30.73,41.4 | IC2.3 38.61,36.32 42.42,36.32 43.18,37.08 46.99,37.08 47.24,37.34 48.26,37.34 48.77,36.83 56.9,36.83 58.17,38.1 ICSP1.3
D53  (via drill 0.61)
  Top 0.254: IC2.2 37.85,39.62 37.85,43.18 36.58,44.45 v36.58,48.51 | v22.86,49.53 22.86,53.34 XIOL.1
  Bottom 0.254: v36.58,48.51 35.56,49.53 v22.86,49.53
DA
  Top 0.254: C3.1 48.51,40.39 R6.1
  Bottom 0.254: R6.1 48.26,44.2 45.72,46.74 IC4.5
DACA  (via drill 0.61)
  Top 0.254: v48.01,34.8 v44.96,31.75 | v66.29,39.62 68.83,42.16 68.83,61.21 69.85,62.23 v69.85,66.8
  Bottom 0.254: IC2.8 43.18,31.75 v44.96,31.75 | v48.01,34.8 48.51,34.29 60.96,34.29 v66.29,39.62 | v69.85,66.8 70.87,67.82 72.9,67.82 76.96,71.88 76.96,73.66 78.23,73.66 X6.12
DACB  (via drill 0.61)
  Top 0.254: v80.01,32.26 81.03,33.27 81.03,60.71 82.55,62.23 82.55,71.88 82.3,72.14 82.3,74.93 X6.13
  Bottom 0.254: IC2.6 38.61,28.7 42.67,28.7 43.18,29.21 53.09,29.21 54.61,27.69 75.44,27.69 v80.01,32.26
DACC  (via drill 0.61)
  Top 0.254: IC3.8 37.08,26.42 37.08,21.08 38.1,20.07 38.1,17.78 39.37,16.51 v39.37,11.43
  Bottom 0.254: v39.37,11.43 40.13,10.67 42.67,10.67 X4.3
DACD  (via drill 0.61)
  Top 0.254: v83.06,26.92 84.07,25.91 84.07,7.62 83.82,7.37 X5.3
  Bottom 0.254: IC3.6 43.43,28.7 45.97,28.7 47.75,26.92 v83.06,26.92
DB
  Top 0.254: IC4.9 48.26,54.61 48.77,55.12 C4.1 R5.1
FUEL  (via drill 0.61)
  Top 0.254: X1.14 2.54,55.12 v5.33,57.91 | v66.8,58.93 67.31,59.44 67.31,69.85 69.85,72.39 X6.1
  Bottom 0.254: v5.33,57.91 5.59,58.17 9.4,58.17 10.67,59.44 14.99,59.44 15.24,59.18 24.38,59.18 25.4,60.2 34.04,60.2 35.05,61.21 59.94,61.21 62.23,58.93 v66.8,58.93
GND  (via drill 0.61)
  Top 0.254: POWER.5 78.74,66.8 76.96,68.58 76.96,74.93 X6.11 76.71,74.93 72.9,78.74 37.08,78.74 37.08,76.71 | v7.37,70.61 4.83,70.61 LEARN.4 | 37.08,76.71 38.35,75.44 38.35,73.66 46.74,73.66 48.01,74.93 X2.25 | 37.08,76.71 14.48,76.71 14.48,72.14 13.21,70.87 LEARN.3 12.95,70.61 12.95,70.36 v11.43,70.36 v11.43,62.48 | RESET.1 3.56,7.37 11.68,7.37 RESET.2 11.94,7.37 12.7,7.37 | 12.7,7.37 v13.46,7.37 | 12.7,7.37 D1.C 14.99,14.99 14.99,18.8 JP5.1 | v23.37,60.2 25.4,60.2 JP4.1 | Q1.2 46.23,26.67 46.23,29.97 R4.2 46.74,31.5 46.74,32.26 49.02,34.54 49.02,38.35 47.5,39.88 47.5,45.97 48.26,46.74 IC4.6 | IC3.7 39.37,27.18 IC2.7 | C4.2 51.31,55.12 50.8,54.61 IC4.8 50.8,54.36 50.55,54.1 50.55,47.24 50.8,46.99 IC4.7 50.8,43.18 C3.2 | JP3.1 29.21,57.15 29.21,52.83 29.72,52.32 29.72,40.39 32.26,37.85 32.26,34.54 | 32.26,34.54 32.26,33.53 34.29,31.5 IC2.5 | v30.73,20.32 30.73,33.02 32.26,34.54
  Bottom 0.254: POWER.4 POWER.5 | v7.37,70.61 7.62,70.36 v11.43,70.36 | 81.53,10.92 80.77,11.68 80.26,11.68 78.99,10.41 51.56,10.41 50.04,8.89 X4.1 | 81.53,10.92 81.53,8.38 79.5,8.38 78.49,7.37 X5.1 | 81.53,10.92 91.19,10.92 PWMH.7 84.84,25.91 70.87,25.91 70.36,26.42 43.69,26.42 | X1.25 2.54,20.32 7.37,20.32 7.62,20.57 16.26,20.57 JP5.1 23.62,20.32 24.89,19.05 29.21,19.05 30.48,20.32 v30.73,20.32 | ICSP.6 16.76,7.37 v13.46,7.37 | Q5.2 34.04,58.67 28.19,58.67 JP3.1 JP4.1 | v23.37,60.2 16.51,60.2 JP6.2 16.51,60.45 13.46,60.45 v11.43,62.48 | Q1.2 46.23,26.67 45.97,26.92 IC3.5 43.69,26.42 | IC2.5 36.07,28.7 37.34,28.7 IC3.7 40.89,25.15 42.42,25.15 43.69,26.42 | IC4.6 48.26,46.99 50.8,46.99 IC4.7 | C3.2 54.36,41.91 55.63,40.64 ICSP1.6
N$1  (via drill 0.61)
  Top 0.254: v77.47,52.07 77.47,8.13 76.96,7.62 76.96,6.6 79.5,4.06 X5.6
  Bottom 0.254: v77.47,52.07 ADCL.3
N$2  (via drill 0.61)
  Top 0.254: v35.81,35.81 35.81,46.48 35.56,46.74 IC4.1
  Bottom 0.254: R7.1 47.5,36.58 43.43,36.58 42.67,35.81 v35.81,35.81
N$4
  Top 0.254: IC4.13 38.1,58.42 R3.2
N$5  (via drill 0.61)
  Top 0.254: v40.39,68.83 40.39,70.61 38.61,72.39 X2.9 | v48.01,66.8 48.26,66.55 ADCH.1
  Bottom 0.254: v40.39,68.83 42.93,66.29 47.5,66.29 v48.01,66.8
N$6
  Top 0.254: R2.2 2.29,9.91 2.29,6.1 3.3,5.08 RESET.5
N$7  (via drill 0.61)
  Top 0.254: v38.1,44.2 IC4.2
  Bottom 0.254: R6.2 v38.1,44.2
N$8  (via drill 0.61)
  Top 0.254: v89.15,40.89 89.15,7.37 X5.5
  Bottom 0.254: ADCL.4 77.22,49.78 80.26,49.78 v89.15,40.89
N$9  (via drill 0.61)
  Top 0.254: ICSP.1 24.13,5.08 24.13,3.3 25.65,1.78 45.21,1.78 45.21,5.33 44.7,5.84 44.7,6.86 45.47,7.62 47.24,7.62 47.24,6.1 48.26,5.08 53.59,5.08 53.59,12.95 55.12,14.48 55.12,25.65 58.67,29.21 58.67,35.31 58.42,35.56 | v54.61,52.83 57.91,49.53 57.91,42.67 59.44,41.15 59.44,36.58 58.42,35.56 | 58.42,35.56 ICSP1.1
  Bottom 0.254: XIOL.4 28.45,52.83 v54.61,52.83
N$10
  Top 0.254: R9.1 LEARN.5
N$12
  Top 0.254: Q1.1 47.75,28.45 R7.2
N$26
  Bottom 0.254: ANT1.1 16,57.15 16.51,57.66 JP6.1
N$28  (via drill 0.61)
  Top 0.254: v9.4,66.29 4.83,66.29 LEARN.2 | v12.45,64.77 12.95,65.28 12.95,66.29 LEARN.1 | JP5.7 18.54,37.59 18.54,62.74 v16.51,64.77
  Bottom 0.254: v9.4,66.29 10.92,64.77 v12.45,64.77 v16.51,64.77
N$33  (via drill 0.61)
  Top 0.254: v37.59,59.18 37.59,58.93 36.32,57.66 Q5.1
  Bottom 0.254: v37.59,59.18 38.1,58.67 42.42,58.67 43.43,59.69 R3.1
N$40
  Top 0.254: R8.1 12.7,24.89 D1.A
RA
  Top 0.254: 44.7,45.21 45.72,44.2 C5.2 | 44.7,45.21 43.18,46.74 IC4.4 43.18,46.99 45.72,49.53 IC4.10 | R4.1 44.7,36.58 44.7,45.21
RCVR5
  Bottom 0.254: R8.2 12.7,30.48 JP5.5
RESET  (via drill 0.61)
  Top 0.254: RESET.3 3.56,2.79 11.68,2.79 RESET.4 11.94,3.05 12.95,4.06 12.95,6.35 ICSP.5 | v50.8,7.62 52.07,8.89 52.07,30.73 55.63,34.29 57.15,34.29 57.15,39.62 58.17,40.64 ICSP1.5
  Bottom 0.254: ICSP1.5 88.14,40.64 88.9,39.88 89.41,39.88 90.17,40.64 90.17,63.5 POWER.1 | ICSP.5 21.59,5.08 30.73,5.08 30.99,4.83 37.08,4.83 39.88,7.62 v50.8,7.62
WL2  (via drill 0.61)
  Top 0.254: JP7.2 61.72,6.86 61.72,13.46 62.23,13.97 v62.23,28.7
  Bottom 0.254: v62.23,28.7 57.66,33.27 32.51,33.27 32,33.78 28.96,33.78 28.45,34.29 24.64,34.29 23.62,35.31 19.3,35.31 JP5.8
WLES  (via drill 0.61)
  Top 0.254: v39.37,49.28 39.37,52.83 37.59,52.83 37.08,53.34 37.08,56.13 35.31,56.13 33.78,57.66 Q5.3 | v72.14,48.51 74.93,51.31 v74.93,66.8
  Bottom 0.254: v39.37,49.28 40.13,48.51 v72.14,48.51 | v74.93,66.8 79.25,71.12 82.3,71.12 83.57,72.39 X6.6
WLXCOLL  (via drill 0.61)
  Top 0.254: Q1.3 49.53,24.13 v49.53,12.19 | v64.52,11.43 66.04,9.91 JP8.3
  Bottom 0.254: v49.53,12.19 50.29,11.43 v64.52,11.43
X2-14  (via drill 0.61)
  Top 0.254: v80.52,10.67 81.53,11.68 81.53,44.96 85.09,48.51 85.09,73.15 83.57,74.68 83.57,75.18 v80.77,77.98
  Bottom 0.254: JP8.2 69.34,8.38 78.23,8.38 v80.52,10.67 | v80.77,77.98 80.52,78.23 21.34,78.23 18.03,74.93 X2.14
~QB
  Top 0.254: R5.2 IC4.12